# Altium PCB Cloud_Buck_PCBLayout.PcbDoc
Units mil, origin at the board's own origin, x right, y up, seen from the top; angles counter-clockwise.
Board outline 2400 x 1825 mil, 2 copper layers (Top Layer, Bottom Layer); 21 components, 14 nets, 64 pads, 12 vias.
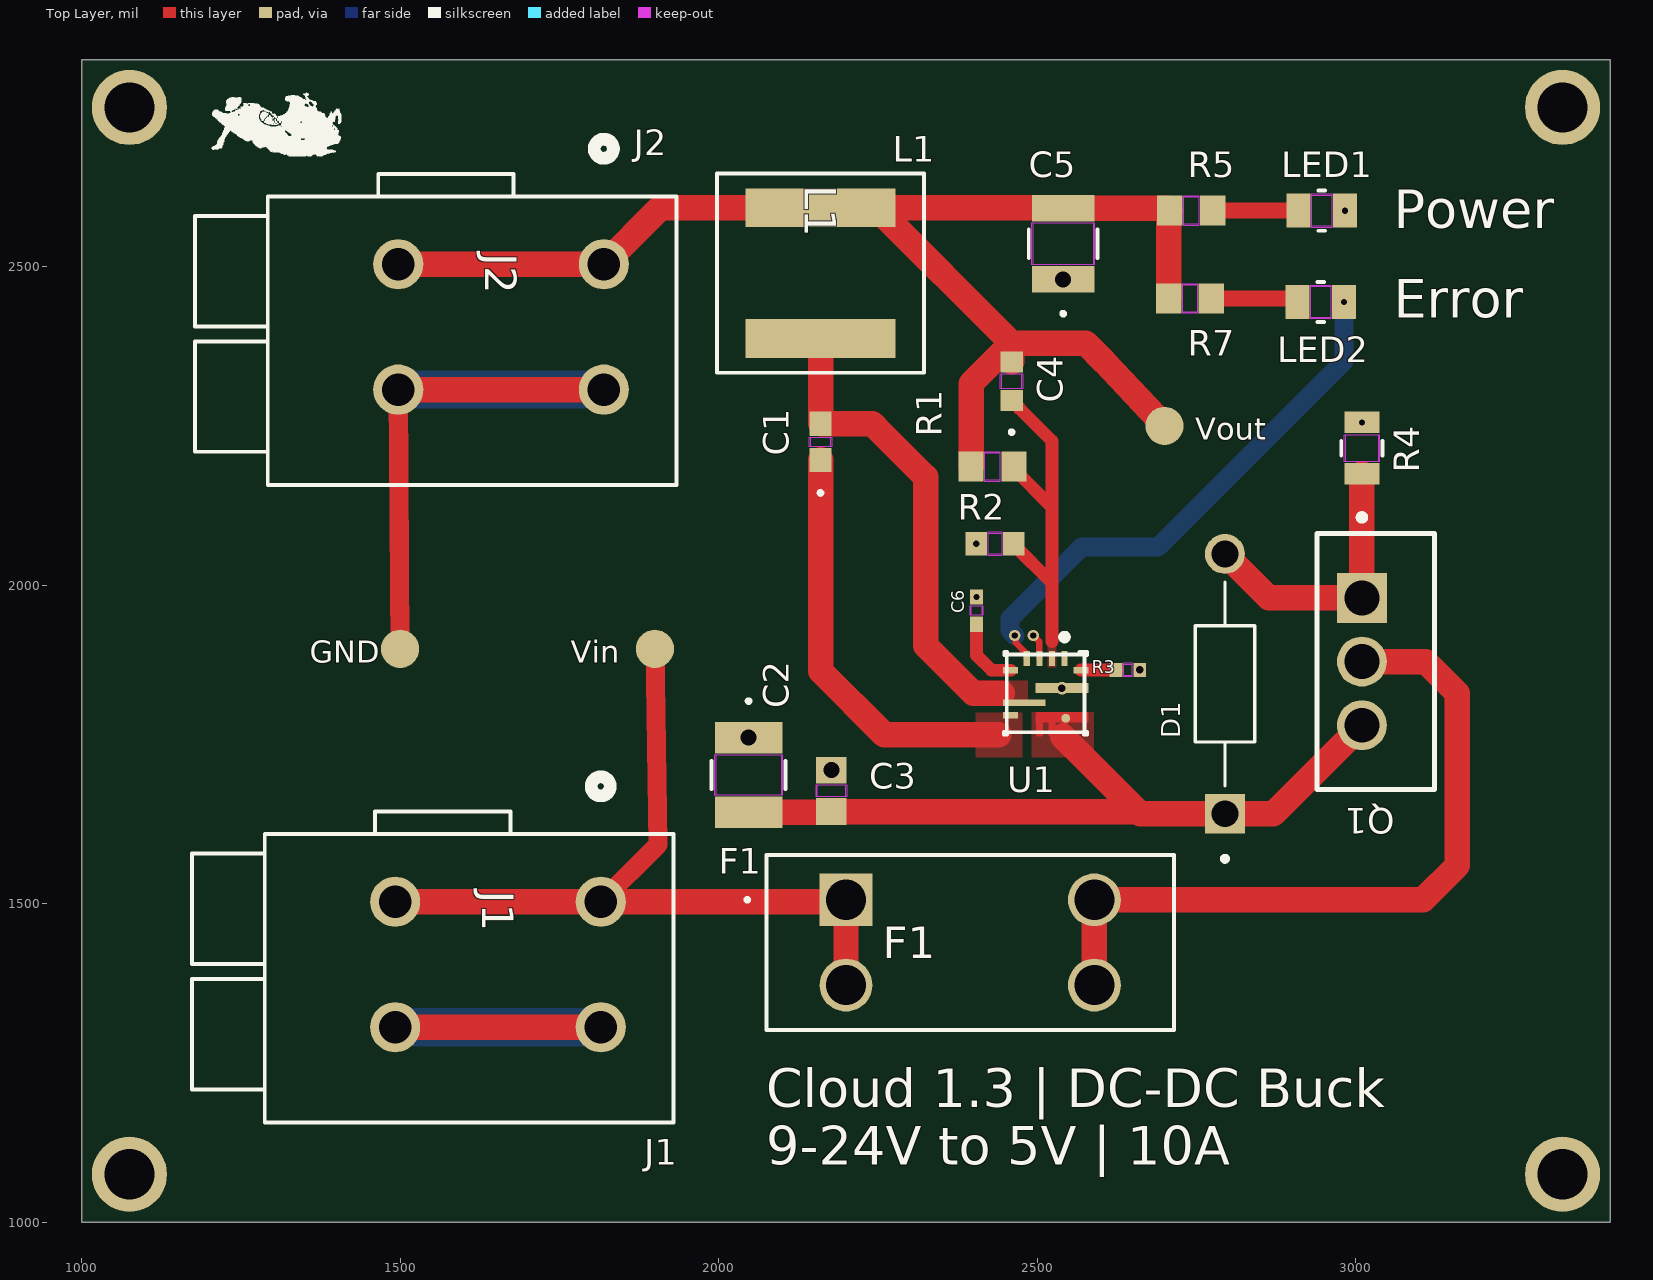
[diagram p0: Top Layer view]
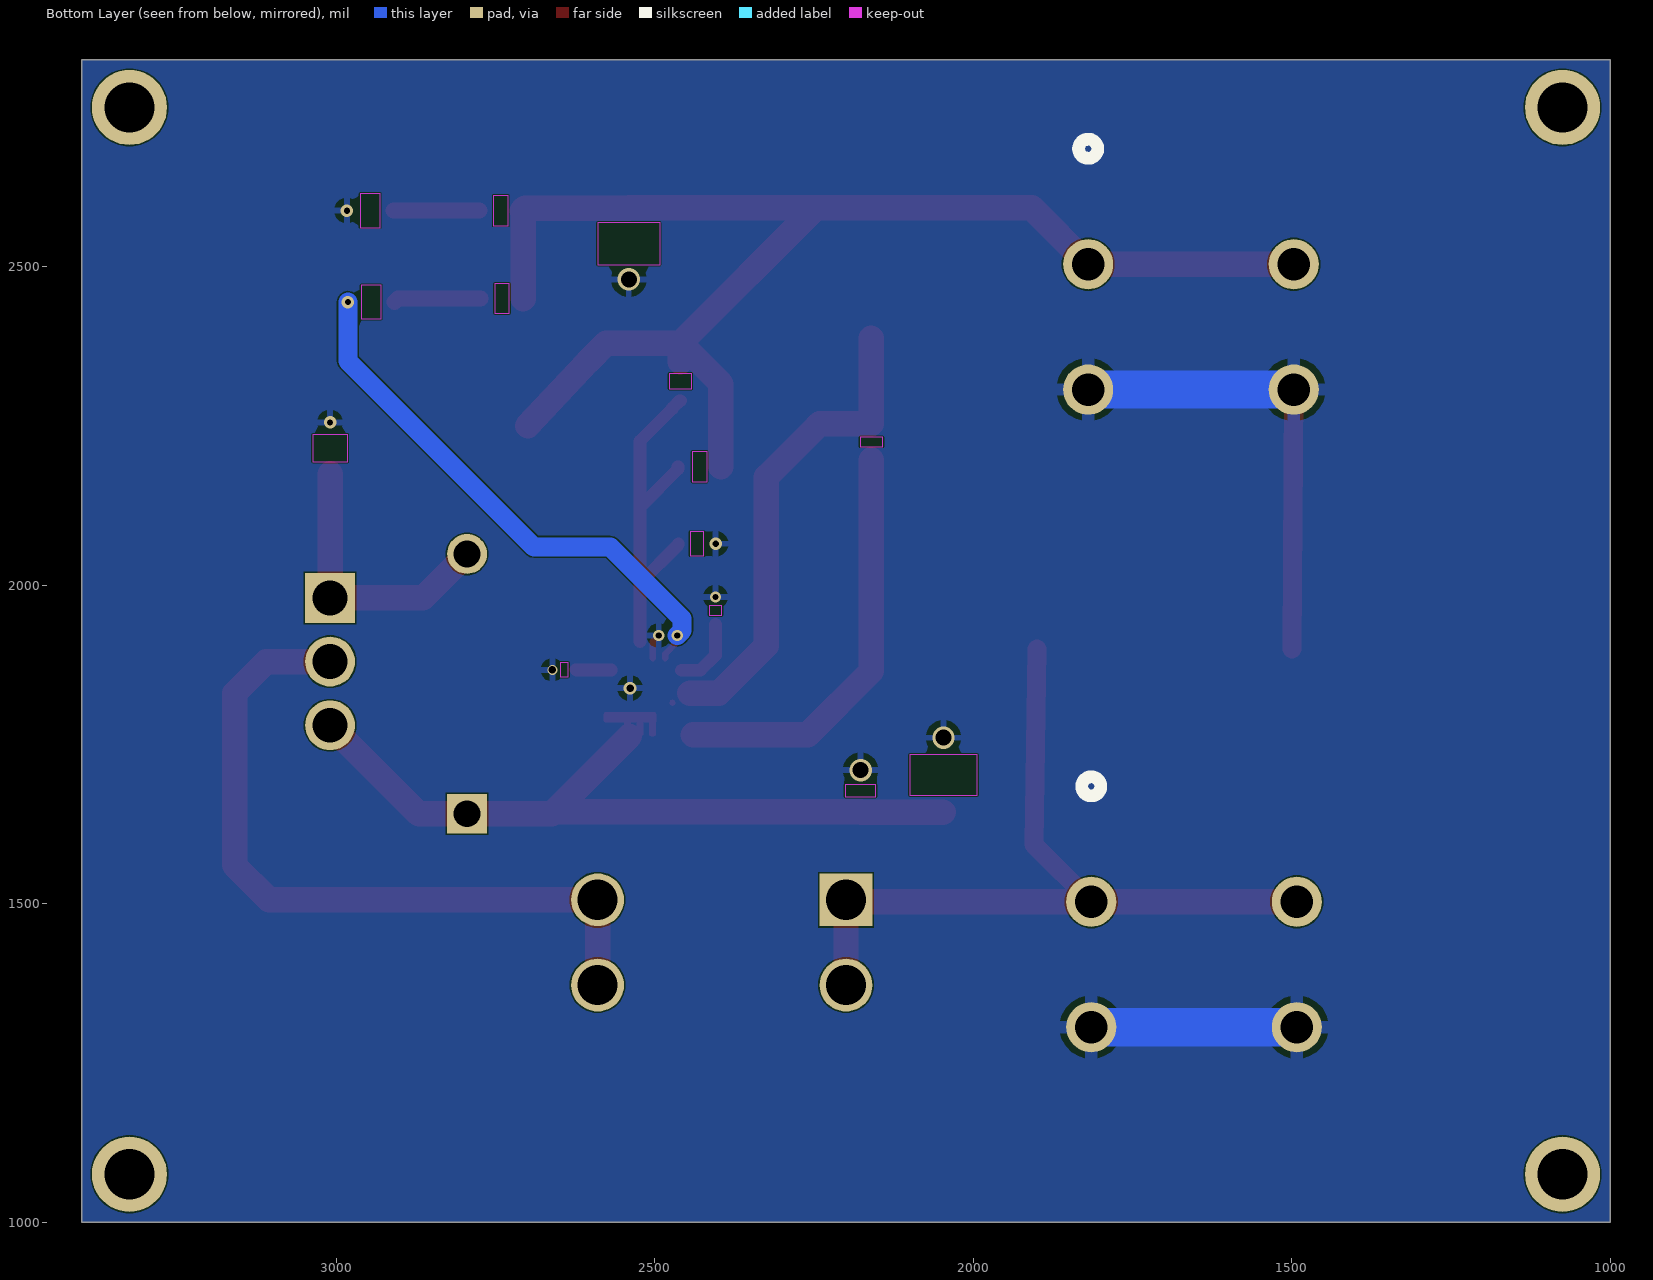
[diagram p1: Bottom Layer view, seen from below]
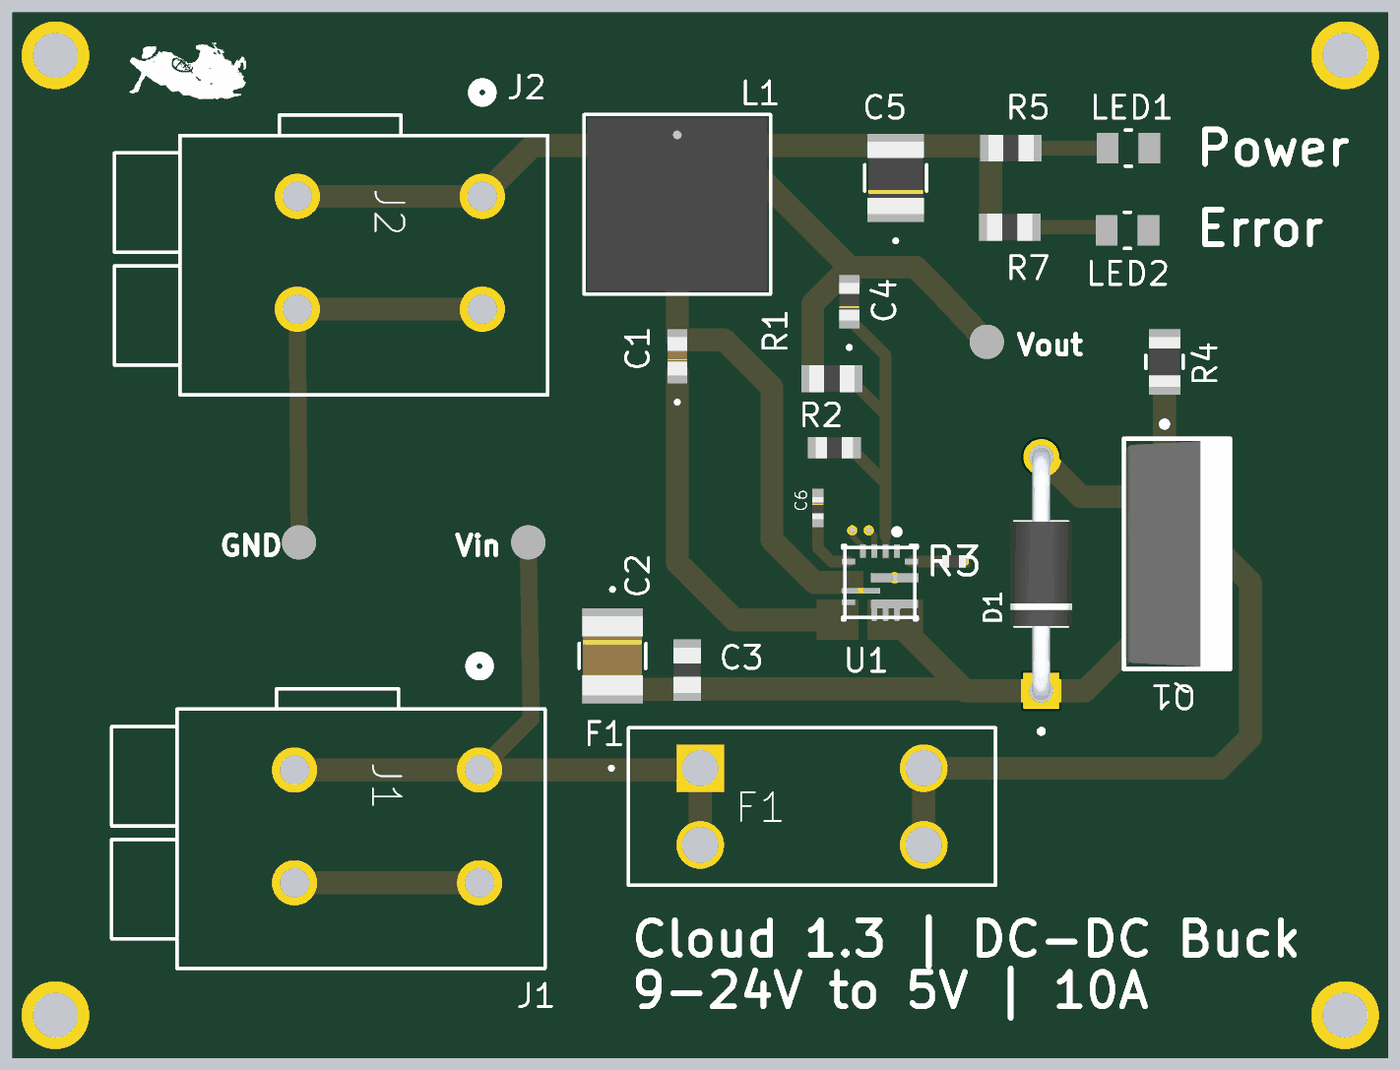
[diagram p2: 3D render of the assembled board from above, using the file's embedded part models]

## Layer stack, top to bottom
Top Solder: solder mask 0.4, Solder Resist, Dk 3.5
Top Layer: signal copper 2
Dielectric 1: dielectric 12.6, FR-4, Dk 4.8
Bottom Layer: signal copper 2
Bottom Solder: solder mask 0.4, Solder Resist, Dk 3.5

## Board outline
1000,1000 3400,1000 3400,2825 1000,2825

## Design rules (kind name [scope] priority, off if disabled: settings)
Clearance [All] p1: gap=2 ignorepadtopadclearanceinfootprint=FALSE except(0: SMDPad-SMDPad)
PlaneClearance [All] p1: clearance=30
PolygonConnect [All] p1: thpad.connectstyle=Relief thpad.reliefconductorwidth=20 thpad.reliefentries=4 thpad.polygonreliefangle="90 Angle" thpad.airgapwidth=10 smdpad.connectstyle=Direct smdpad.reliefconductorwidth=10 smdpad.reliefentries=4 smdpad.polygonreliefangle="90 Angle" smdpad.airgapwidth=10 via.connectstyle=Relief via.reliefconductorwidth=10 via.reliefentries=4 via.polygonreliefangle="90 Angle" via.airgapwidth=10
RoutingVias [All] p1: holewidth=28 width=50 viastyle="Through Hole" minholewidth=28 minwidth=50 maxholewidth=28 maxwidth=50
SolderMaskExpansion [All] p1: expansion=0 istentingtop=FALSE
SupplyNets "Schematic Supply Nets" [InNet('GND')] p1: voltage=0.000
Width [All] p1: maxlimit=100 minlimit=10 preferedwidth=10 minimp=50.000000 maximp=50.000000 favimp=50.000000
29 further rules are at their usual default settings.

## Classes and differential pairs
component class Cloud_Buck_Sch: C1 C2 C3 C6 D1 F1 J1 J2 L1 LED1 LED2 Q1 R1 R3 R4 R5 R7 U1

## Components (designator, comment, footprint, x,y, rotation, side; value= is the part's Value field where it differs from the comment)
C1 "EMK107B7104KA-T" cap_UMK107ABJ474KA-T_TAY 2160,2225 r90 top
C2 "MSASU32MSB5106KPNA01" CAP_MSAS32-M_TAY 2047,1702 r270 top
C3 "CC0805KRX7R9BB104" CC0805N_YAG 2177,1677 r270 top
C4 "GRM1885C1H101JA01D" CAP_188_MUR 2460,2320 r90 top
C5 "GRM32ER61C476KE15L" G-32_MUR 2541,2536 r90 top
C6 "GRM155R71C223KA01D" G-155_MUR 2405,1960 r270 top
D1 "1N4742A" DIOAD1036W78L463D237 2795,1845 r90 top
F1 "3568" 3568_KEY 2200,1506 r0 top
J1 "2604-1102" CONN2_2604-1102_WAG 1815,1502.85 r270 top
J2 "2604-1102" CONN2_2604-1102_WAG 1819.83,2503.85 r270 top
L1 "XAL7070-332MEC" IND_XAL7070_COC 2160,2490 r270 top
LED1 "LTST-C170KGKT" LED_LTST-C170KGKT_LTO 2947,2588 r180 top
LED2 "LTST-C170KGKT" LED_LTST-C170KGKT_LTO 2945.5,2444.5 r180 top
Q1 "IRF4905" IFX-PG-TO220-3-904-1 3010,1880 r270 top
R1 "ERJ-6ENF7322V" RC0805N_PAN 2430,2186 r0 top
R2 "CRCW060310K0FKEA" RES_CRCW_0603 2434,2065 r180 top
R3 "CRCW040252K3FKED" RES_CRCW_0402 2642.5,1867 r0 top
R4 "CRCW080510K0FKEA" RES_CRCW_0805 3010,2215 r90 top
R5 "RC0805FR-071K5L" RC0805N_YAG 2742,2588 r0 top
R7 "RC0805FR-071K5L" RC0805N_YAG 2740,2450 r0 top
U1 "TPS56A37RPAR" RPA0010A-MFG 2513.5,1829.98 r270 top

## Footprints (in the part's own frame and the unit in brackets; to place one, negate y for a bottom-side part, rotate by r counter-clockwise, add the part's x,y. Pads: shape width x height; smd on the part's side, far side on the other; paste and mask are expansions set on the pad)
3568_KEY [mil]
  rect 83x83 hole 63 paste-99999 mask+0: 1(0,0)
  round 83 hole 63 paste-99999 mask+0: 2(0,-134) 3(390,-134) 4(390,0)
  silkscreen extent -158,-204 515,70
CAP_188_MUR [mil]
  rect 32.78x35 smd paste+0 mask+0: 1(-30.39,0) 2(30.39,0)
  Top Layer keep-out region: -12,-15.5 -12,15.5 12,15.5 12,-15.5
  Keep-Out Layer region: -12,-17.5 -12,17.5 12,17.5 12,-17.5
  silkscreen extent -83,-3 -77,3, body extent -33,-17 33,17, height 35
CAP_MSAS32-M_TAY [mil]
  rect 49x106 smd paste+0 mask+0: 1(-58.5,0) 2(58.5,0)
  Top Layer keep-out region: -32,-51 -32,51 32,51 32,-51
  Keep-Out Layer region: -32,-53 -32,53 32,53 32,-53
  silkscreen extent -119,-58 22,58, body extent -69,-53 69,53, height 106
cap_UMK107ABJ474KA-T_TAY [mil]
  rect 37.78x35 smd paste+0 mask+0: 1(-28.39,0) 2(28.39,0)
  Top Layer keep-out region: -7.5,-15.5 -7.5,15.5 7.5,15.5 7.5,-15.5
  Keep-Out Layer region: -7.5,-17.5 -7.5,17.5 7.5,17.5 7.5,-17.5
  silkscreen extent -83,-3 -77,3, body extent -34,-17 34,17, height 35
CC0805N_YAG [mil]
  rect 42x48 smd paste+0 mask+0: 1(-32.5,0) 2(32.5,0)
  Top Layer keep-out region: -9.5,-22 -9.5,22 9.5,22 9.5,-22
  Keep-Out Layer region: -9.5,-24 -9.5,24 9.5,24 9.5,-24
  body extent -39,-24 39,24, height 28
CONN2_2604-1102_WAG [mm]
  round 2 hole 1.3 paste-2539.97 mask+0: 1(0,0) 2(0,-8.2) 3(5,0) 4(5,-8.2)
  silkscreen extent -4.99,-16.3 8.8,2.9
DIOAD1036W78L463D237 [mm]
  rect 1.59x1.59 / inner round 1.59 / far side rect 1.59x1.59 hole 1.06 mask+0.102: 1(-5.18,0)
  round 1.59 hole 1.06 mask+0.102: 2(5.18,0)
  silkscreen extent -7.07,-1.19 4.07,1.19, body extent -5.57,-1.36 5.57,1.36, height 2.72
G-32_MUR [mil]
  rect 41.78x98 smd paste+0 mask+0: 1(-55.89,0) 2(55.89,0)
  Top Layer keep-out region: -33,-47 -33,47 33,47 33,-47
  Keep-Out Layer region: -33,-49 -33,49 33,49 33,-49
  silkscreen extent -113,-54 23,54, body extent -63,-49 63,49, height 110
G-155_MUR [mil]
  rect 24x20 smd paste+0 mask+0: 1(-21.5,0) 2(21.5,0)
  Top Layer keep-out region: -7.5,-8 -7.5,8 7.5,8 7.5,-8
  Keep-Out Layer region: -7.5,-10 -7.5,10 7.5,10 7.5,-10
  body extent -19,-10 19,10, height 22
IFX-PG-TO220-3-904-1 [mm] "TO,flange mount,2.54 mm pitch, 3 pin, 10.16 mm L X 4.57 mm W X 20.56 mm H body"
  rect 1.99x1.99 hole 1.39 paste-2539.97 mask+0: 1(-2.54,0)
  round 1.99 hole 1.39 paste-2539.97 mask+0: 2(0,0) 3(2.54,0)
  silkscreen extent -5.87,-1.8 5.1,2.9, body extent -5.16,-1.72 5.16,2.86, height 19.84
IND_XAL7070_COC [mil]
  rect 61x236 smd paste+0 mask+0: 1(-102.5,0) 2(102.5,0)
  silkscreen extent -157,-163 157,163, body extent -151,-157 151,157, height 276
LED_LTST-C170KGKT_LTO [mil]
  rect 38x53 smd paste+0 mask+0: 1(-36.5,0) 2(36.5,0)
  Top Layer keep-out region: -15.5,-24.5 -15.5,24.5 15.5,24.5 15.5,-24.5
  Keep-Out Layer region: -15.5,-26.5 -15.5,26.5 15.5,26.5 15.5,-26.5
  silkscreen extent -5,-32 5,32
RC0805N_PAN [mm]
  rect 1.006x1.2 smd paste+0 mask+0: 1(-0.853,0) 2(0.853,0)
  Top Layer keep-out region: -0.299,-0.549 -0.299,0.549 0.299,0.549 0.299,-0.549
  Keep-Out Layer region: -0.299,-0.6 -0.299,0.6 0.299,0.6 0.299,-0.6
  body extent -1,-0.6 1,0.6, height 0.71
RC0805N_YAG [mil]
  rect 40x47 smd paste+0 mask+0: 1(-33.5,0) 2(33.5,0)
  Top Layer keep-out region: -11.5,-21.5 -11.5,21.5 11.5,21.5 11.5,-21.5
  Keep-Out Layer region: -11.5,-23.5 -11.5,23.5 11.5,23.5 11.5,-23.5
  body extent -39,-24 39,24, height 28
RES_CRCW_0402 [mil]
  rect 20x22 smd paste-11 mask-11: 1(-18.5,0) 2(18.5,0)
  Top Layer keep-out region: -6.5,-9 -6.5,9 6.5,9 6.5,-9
  Keep-Out Layer region: -6.5,-11 -6.5,11 6.5,11 6.5,-11
  body extent -21,-11 21,11, height 16
RES_CRCW_0603 [mil]
  rect 33.78x37 smd paste+0 mask+0: 1(-29.39,0) 2(29.39,0)
  Top Layer keep-out region: -10.5,-16.5 -10.5,16.5 10.5,16.5 10.5,-16.5
  Keep-Out Layer region: -10.5,-18.5 -10.5,18.5 10.5,18.5 10.5,-18.5
  body extent -33,-19 33,19, height 20
RES_CRCW_0805 [mil]
  rect 33.78x55 smd paste+0 mask+0: 1(-40.39,0) 2(40.39,0)
  Top Layer keep-out region: -21.5,-25.5 -21.5,25.5 21.5,25.5 21.5,-25.5
  Keep-Out Layer region: -21.5,-27.5 -21.5,27.5 21.5,27.5 21.5,-27.5
  silkscreen extent -11,-32 11,32, body extent -44,-27 44,27, height 20
RPA0010A-MFG [mm]
  rect 0.6x0.25 smd paste+0 mask+0: 1(-1.4,0.75) 2(-1.4,0.25) 3(-1.4,-0.25) 4(-1.4,-0.75)
  rect 0.25x0.6 smd paste+0 mask+0: 5(-0.93,-1.4) 7(0.87,-1.4) 10(-0.93,1.4)
  rect 0.25x1.7 smd paste-0.837 mask+0: 6(0.37,-0.85)
  round 0.35 smd paste+0 mask+0: 8(0.99,0.8)
  rect 0.4x2.1 smd paste-1.037 mask+0: 9(-0.21,0.65)
  Top Layer region: 1.1,1.7 0.8,1.7 0.75,1.65 0.75,-0.35 0.8,-0.4 1.15,-0.4 1.15,-0.375 1.66,-0.375 1.71,-0.325 1.71,-0.175 1.66,-0.125 1.15,-0.125 1.15,0.125 1.66,0.125 1.71,0.175 1.71,0.325 1.66,0.375 1.15,0.375 1.15,0.625 1.66,0.625 1.71,0.675 1.71,0.825 1.66,0.875 1.2,0.875 1.15,0.925 1.15,1.65
  silkscreen extent -2.37,-1.66 1.65,1.65

## Part data
C1 C2: "Description", Manufacturer_Name="TAIYO YUDEN"
  C1: Copyright="Copyright (C) 2025 Ultra Librarian. All rights reserved.", Manufacturer_Part_Number=EMK107B7104KA-T
  C2: Copyright="Copyright (C) 2026 Ultra Librarian. All rights reserved.", Manufacturer_Part_Number=MSASU32MSB5106KPNA01
C3 R5 R7: "Description", Manufacturer_Name=Yageo, Copyright="Copyright (C) 2025 Ultra Librarian. All rights reserved."
  C3: Manufacturer_Part_Number=CC0805KRX7R9BB104
  R5 R7: Manufacturer_Part_Number=RC0805FR-071K5L
C4: "CAP CER 100PF 50V C0G/NP0 0603", Manufacturer_Name=Murata, Copyright="Copyright (C) 2026 Ultra Librarian. All rights reserved.", Manufacturer_Part_Number=GRM1885C1H101JA01D
C5 C6: "Description", Manufacturer_Name=Murata
  C5: Copyright="Copyright (C) 2025 Ultra Librarian. All rights reserved.", Manufacturer_Part_Number=GRM32ER61C476KE15L
  C6: Copyright="Copyright (C) 2026 Ultra Librarian. All rights reserved.", Manufacturer_Part_Number=GRM155R71C223KA01D
D1: "Zener Diode, Single, Two Terminal, 12V V(Z), 5%, DO-204AL", Package="DO-41 Fairchild Semiconductor", Check_prices=https://www.snapeda.com/parts/1N4742A/Onsemi/view-part/?ref=eda, MF="ON Semiconductor", MP=1N4742A, SnapEDA_Link=https://www.snapeda.com/parts/1N4742A/Onsemi/view-part/?ref=snap
F1: "Description", Manufacturer_Name="Keystone Electronics", Copyright="Copyright (C) 2026 Ultra Librarian. All rights reserved.", Manufacturer_Part_Number=3568, RefDes=RefDes, Type=Type
J1 J2: "Description", Manufacturer_Name=Wago, Copyright="Copyright (C) 2025 Ultra Librarian. All rights reserved.", Manufacturer_Part_Number=2604-1102, RefDes=RefDes, Type=Type
L1: "Description", Manufacturer_Name=Coilcraft, Copyright="Copyright (C) 2026 Ultra Librarian. All rights reserved.", Manufacturer_Part_Number=XAL7070-332MEC, Type="Fixed Inductors"
LED1 LED2: "Description", Manufacturer_Name=LITE-ON, Copyright="Copyright (C) 2025 Ultra Librarian. All rights reserved.", Manufacturer_Part_Number=LTST-C170KGKT
Q1: "OptiMOS - P2 Power-Transistor, P-channel-Enhancement mode, VDS -30V", Manufacturer="Infineon Technologies", Manufacturer Order NumberManufacturer Order Number=IRF4905, PackageReference=PG-TO220-3-904
R1: "Description", Manufacturer_Name=Panasonic, Copyright="Copyright (C) 2026 Ultra Librarian. All rights reserved.", Manufacturer_Part_Number=ERJ-6ENF7322V
R2: "D11/CRCW0603 100 10K 1% ET1 e3", Manufacturer_Name=Vishay, Copyright="Copyright (C) 2025 Ultra Librarian. All rights reserved.", Manufacturer_Part_Number=CRCW060310K0FKEA
R3: "D10/CRCW0402 100 52K3 1% ET7 e3", Manufacturer_Name=Vishay, Copyright="Copyright (C) 2026 Ultra Librarian. All rights reserved.", Manufacturer_Part_Number=CRCW040252K3FKED
R4: "D12/CRCW0805 100 10K 1% ET1 e3", Manufacturer_Name=Vishay, Copyright="Copyright (C) 2025 Ultra Librarian. All rights reserved.", Manufacturer_Part_Number=CRCW080510K0FKEA
U1: "4.5V to 28V input, 10A synchronous buck converter 10-VQFN-HR -40 to 150", Manufacturer_Name="Texas Instruments", Copyright="Copyright (C) 2026 Ultra Librarian. All rights reserved.", Manufacturer_Part_Number=TPS56A37RPAR, RefDes=RefDes, Type=TYPE

## Free pads (board coordinates)
  round 60 smd: 3(1500,1900) 4(1900,1900) 4(2700,2250)
  round 118.11 hole 78.74: ""(1075,1075) ""(1075,2750) ""(3325,1075) ""(3325,2750)

## Via types
v1: diameter 19.68, hole 9.84, Top Layer to Bottom Layer, 4 vias
v2: diameter 17.72, hole 9.84, Top Layer to Bottom Layer, 3 vias
v3: diameter 35, hole 25, Top Layer to Bottom Layer, 3 vias
v4: diameter 15.75, hole 11.81, Top Layer to Bottom Layer, 1 vias
v5: diameter 19.68, hole 11.81, Top Layer to Bottom Layer, 1 vias

## Nets (pads, with @x,y where several pads share a name; then routed paths per layer and width w, separated by ;. In a path a pad name is that pad's centre, name@x,y a point inside that pad or via, vN(x,y) a via of type N, cw(c..) or ccw(c..) an arc to the next point about the centre after c; other vN are vias at no path point)
GND: C2.1 C3.1 C5.1 C6.1 J1.3 J1.4 J2.3 J2.4 LED1.1 pad.3 R2.2 R3.2 R4.2 U1.3 U1.9 | length 1738.4
  Top Layer w10: v2(2494,1921) 2494.24,1921 2503.66,1911.58 U1.3
  Top Layer w30: J2.4 pad.3
  Top Layer w40: J1.4 J1.3 ; J2.4 J2.3
  Bottom Layer w60: J1.4 J1.3 ; J2.4 J2.3
  other v1: 2404.61,2065 3010,2255.39 2983.5,2588
  other v2: 2405,1981.5
  other v3: 2177,1709.5 2047,1760.5 2541,2480.11
  other v4: 2661,1867
  other v5: 2539.09,1838.24
NetC1_1: C1.1 U1.7 | length 653
  Top Layer w40: C1.1 2160,1865 2260,1765 2440,1765
NetC1_2: C1.2 L1.2 U1.6 | length 749.9
  Top Layer w10: U1.6@2472.32,1815.65 U1.6@2472.47,1815.49
  Top Layer w40: L1.2 C1.2 2241.61,2253.39 2245,2250 2325,2170 2325,1905 2400,1830 2445,1830
NetC4_1: C4.1 R1.2 R2.1 U1.2 | length 579.9
  Top Layer w20: C4.1 2461.11,2289.61 2472.5,2278.22 2472.5,2277.11 2523.35,2226.26 2523.35,2122.4 ; R2.1 2463.39,2063.39 2523.35,2003.43 ; R1.2 2463.57,2182.17 2523.35,2122.4 ; 2523.35,1911.35 2523.35,2003.43 ; 2523.35,2003.43 2523.35,2122.4
NetC6_2: C6.2 U1.5 | length 111.6
  Top Layer w20: C6.2 2405,1890 2428.41,1866.59 U1.5
NetD1_2: D1.2 Q1.1 R4.1 | length 438.2
  Top Layer w40: D1.2 2863.94,1980 Q1.1 R4.1
NetF1_1: F1.1 F1.2 J1.1 J1.2 pad.4@1900,1900 | length 1277.6
  Top Layer w30: J1.1 1905,1592.85 pad.4@1900,1900
  Top Layer w40: J1.2 J1.1 2196.85,1502.85 F1.1 F1.2
NetF1_3: F1.3 F1.4 Q1.2 | length 1167.1
  Top Layer w40: F1.3 F1.4 3106,1506 3160,1560 3160,1830 3110,1880 Q1.2
NetLED1_2: LED1.2 R5.2 | length 135
  Top Layer w25: R5.2 LED1.2
NetLED2_1: LED2.1 U1.4 | length 858
  Top Layer w10: v2(2465,1921) 2466.48,1919.52 2466.48,1909.33 2483.98,1891.83 U1.4
  Bottom Layer w30: v2(2465,1921) 2457.43,1928.57 2457.43,1947.43 2570,2060 2690,2060 2982,2352 v1(2982,2444.5)
NetLED2_2: LED2.2 R7.2 | length 137.8
  Top Layer w25: R7.2 2903.5,2450 LED2.2
NetR3_1: R3.1 U1.10 | length 55.5
  Top Layer w20: U1.10 2568.7,1866.67 2623.67,1866.67 R3.1
Vin: C2.2 C3.2 D1.1 Q1.3 U1.8 | length 1194.3
  Top Layer w40: C2.2 2176,1643.5 C3.2 2658.23,1644.5 2661.67,1641.06 ; 2540.08,1762.65 2661.67,1641.06 ; Q1.3 2871.06,1641.06 D1.1 2661.67,1641.06
Vout: C4.2 C5.2 J2.1 J2.2 L1.1 pad.4@2700,2250 R1.1 R5.1 R7.1 | length 2235.2
  Top Layer w40: J2.2 J2.1 1908.48,2592.5 L1.1 L1.1@2247.5,2592.5 ; R1.1 2396.43,2316.43 2460,2380 ; C4.2 2460,2380 ; pad.4@2700,2250 2606.36,2350 2576.36,2380 2460,2380 ; R7.1 2706.5,2586 R5.1 2704.61,2591.89 C5.2 2540.39,2592.5 L1.1@2247.5,2592.5 ; L1.1@2247.5,2592.5 2460,2380
pads on no net: U1.1

## Polygon pours and split planes (outlines as drawn)
NetC4_1 on Top Layer "NETC4_1_L01_P006" (solid, pour order 6): 2517,1919 2530,1919 2530,1871 2517,1871
Vin on Top Layer "VIN_L01_P000" (solid, pour order 0): 2492,1800.45 2589,1800.45 2589,1730 2492,1730
NetC1_1 on Top Layer "NETC1_1_L01_P001" (solid, pour order 1): 2476.5,1800 2403.5,1800 2403.5,1730 2476.5,1730
NetC1_2 on Top Layer "NETC1_2_L01_P003" (solid, pour order 3): 2515,1811 2515,1820 2485,1820 2485,1850 2407,1850 2407,1811
GND on Bottom Layer "GND_L02_P004" (solid, pour order 4): 1000,1000 1000,2825 3400,2825 3400,1000

## Silkscreen, mask and mechanical layers (free items; w line width, h text height)
Top Overlay:
  drawing of 12 lines, arcs and shapes, not listed
  text "Power" at 3060,2560 h60
  text "Error" at 3060,2420 h60
  text "Vout" at 2748,2228 h35
  text "GND" at 1358,1878 h35
  text "Vin" at 1768,1878 h35
  text "Cloud 1.3 | DC-DC Buck" at 2075,1180 h60
  text "9-24V to 5V | 10A" at 2075,1090 h60